# Altium PCB PCB.PcbDoc
Units mil, origin at the board's own origin, x right, y up, seen from the top; angles counter-clockwise.
Board outline 6000 x 4000 mil, 2 copper layers (Top Layer, Bottom Layer); 47 components, 29 nets, 204 pads, 42 vias.
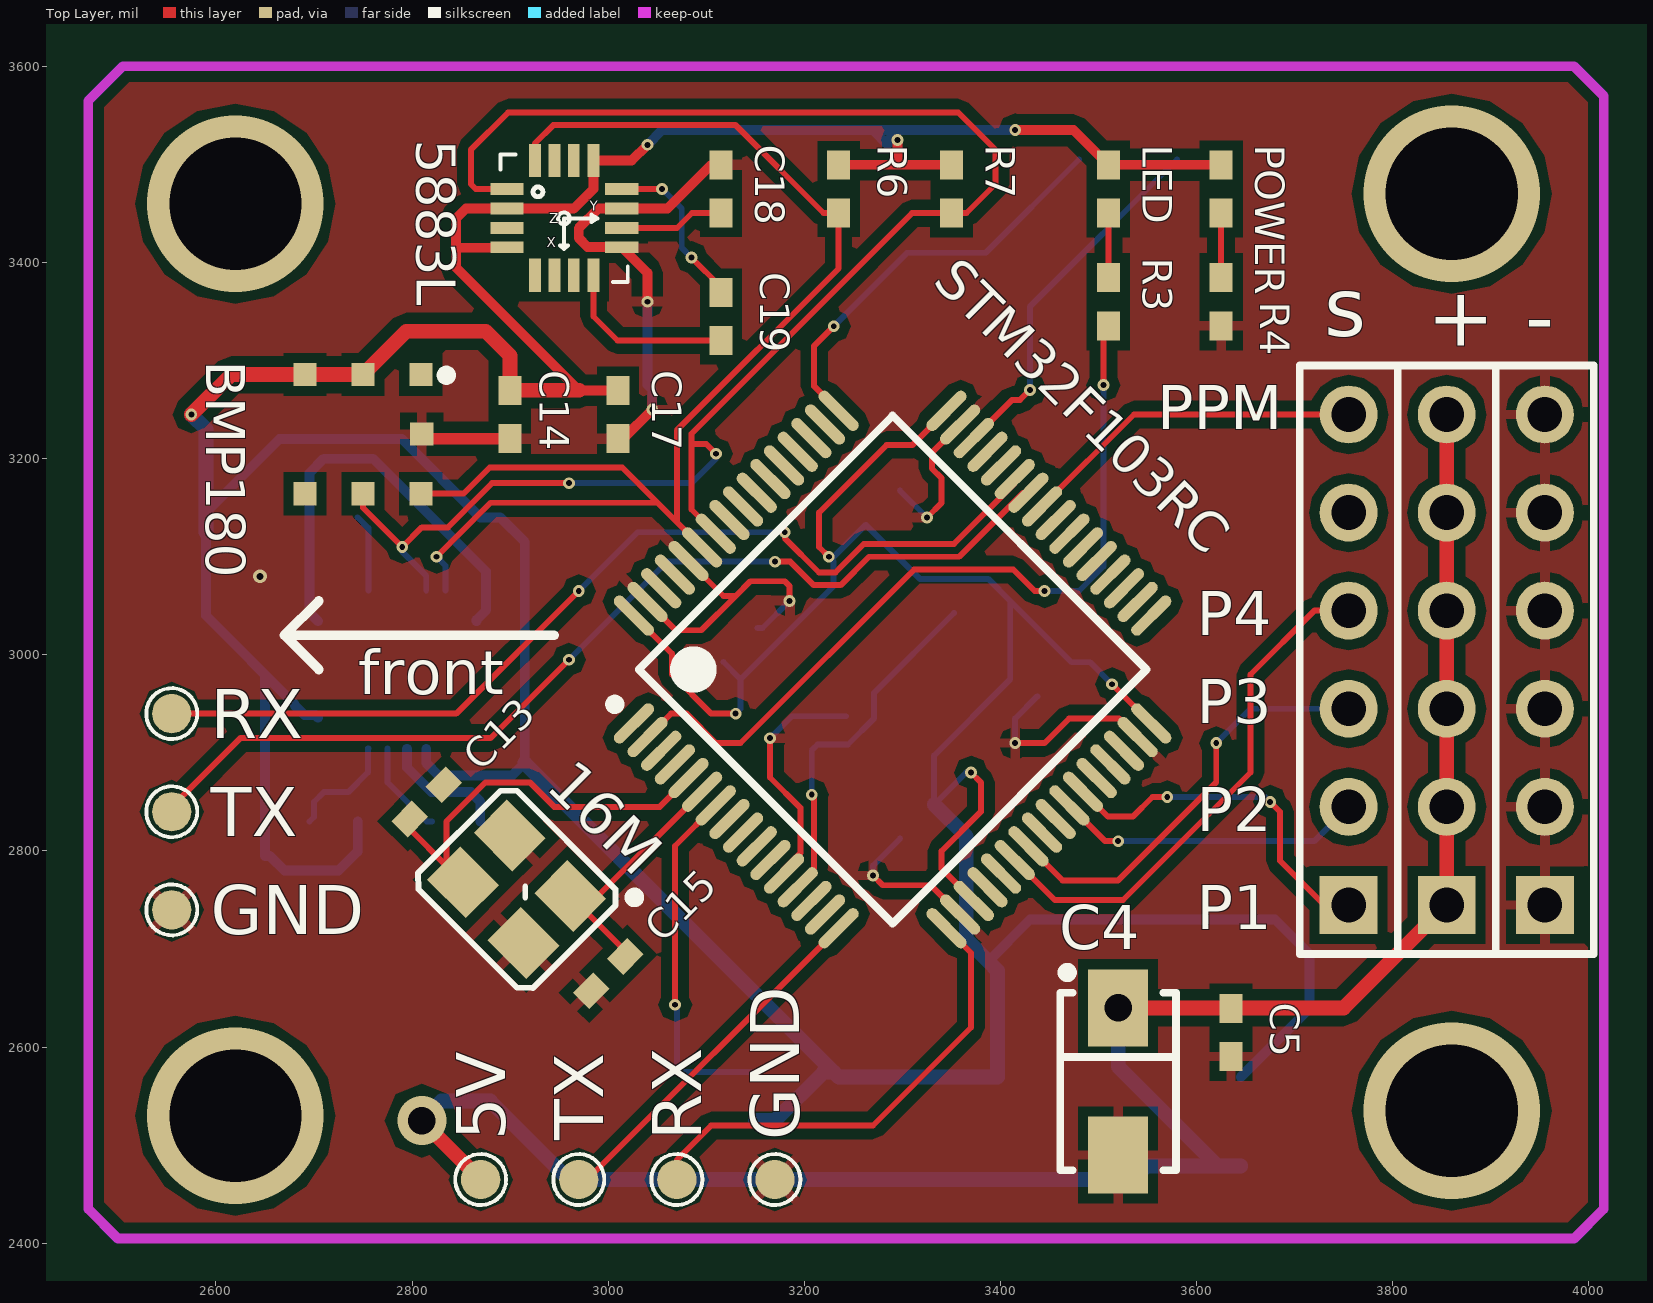
[diagram p0: Top Layer view]
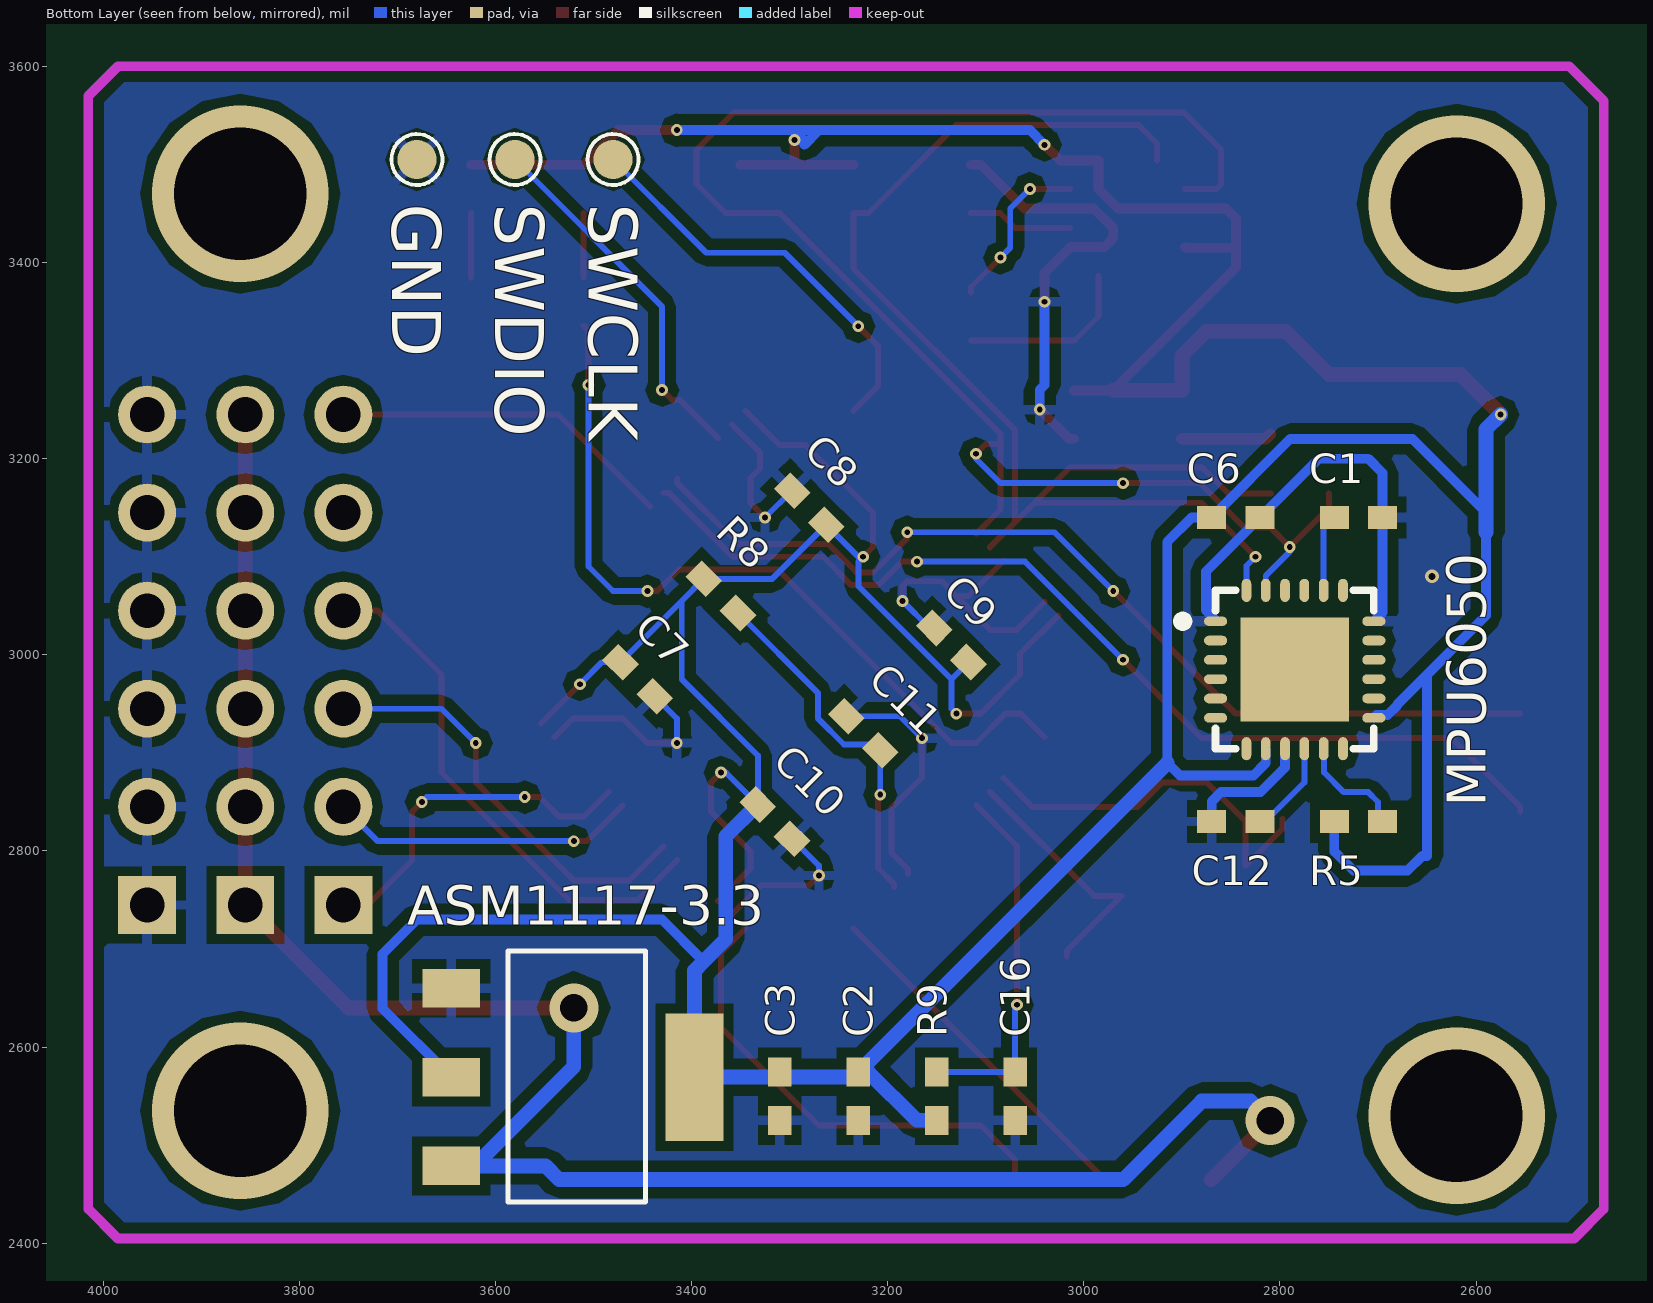
[diagram p1: Bottom Layer view, seen from below]

## Layer stack, top to bottom
Top Solder: solder mask 0.4, Solder Resist, Dk 3.5
Top Layer: signal copper 1.4
Dielectric 1: dielectric 12.6, FR-4, Dk 4.8
Bottom Layer: signal copper 1.4
Bottom Solder: solder mask 0.4, Solder Resist, Dk 3.5

## Board outline
1000,1000 7000,1000 7000,5000 1000,5000

## Design rules (kind name [scope] priority, off if disabled: settings)
Clearance [All] p1: gap=7
ComponentClearance [All] p1: gap=0 collisioncheckmode=3 verticalgap=10 showdistances=FALSE
Height [All] p1: minheight=0 maxheight=1500 prefheight=1500
PolygonConnect [All] p1: connectstyle=Relief reliefconductorwidth=10 reliefentries=4 polygonreliefangle="90 Angle" airgapwidth=10
RoutingVias [All] p1: holewidth=6 width=12 viastyle="Through Hole" minholewidth=6 minwidth=12 maxholewidth=28 maxwidth=50
SolderMaskExpansion [All] p1: expansion=4
Width [All] p1: maxlimit=15 minlimit=6 preferedwidth=6
27 further rules are at their usual default settings.

## Components (designator, comment, footprint, x,y, rotation, side; value= is the part's Value field where it differs from the comment)
5V "VCC_5V" pad 2870,2465 r0 top (schematic designator P4)
16M "16M" TCXO 2900,2860 r315 top (schematic designator T1)
5883L "HMC5883L" HMC5883L 2900,3505 r0 top (schematic designator U3)
+ "Header 6" HDR1X6 3855,2745 r90 top (schematic designator P2)
- "Header 6" HDR1X6 3955,2745 r90 top (schematic designator P3)
ASM1117-3.3 "ASM1117-3.3" AMS1117 3645,2660 r270 bottom (schematic designator A1)
BMP180 "bmp180" BMP180 2750,3225 r270 top (schematic designator U2)
C1 "2.2nF" 0402packg 2720,3140 r180 bottom
C2 "4.7uF" 0402packg 3230,2550 r90 bottom
C3 "0.1uF" 0402packg 3310,2550 r90 bottom
C4 "10uF" "DIOM SMA_4326X27N" 3520,2565 r90 top
C5 "0.1uF" 0402packg 3635,2615 r90 top
C6 "0.1uF" 0402packg 2845,3140 r180 bottom
C7 "0.1uF" 0402packg 3455,2975 r45 bottom
C8 "0.1uF" 0402packg 3280,3150 r225 bottom
C9 "0.1uF" 0402packg 3135,3010 r225 bottom
C10 "0.1uF" 0402packg 3315,2830 r45 bottom
C11 "0.1uF" 0402packg 3225,2920 r45 bottom
C12 "0.1uF" 0402packg 2845,2830 r180 bottom
C13 "10pF" 0402packg 2815,2850 r225 top
C14 "0.1uF" 0402packg 2900,3245 r270 top
C15 "10pF" 0402packg 3000,2675 r225 top
C16 "1uF" 0402packg 3070,2550 r90 bottom
C17 "0.1uF" 0402packg 3010,3245 r90 top
C18 "4.7uF" 0402packg 3115,3475 r270 top
C19 "0.22uF" 0402packg 3115,3345 r270 top
GND "GND" pad 3680,3505 r270 bottom (schematic designator P13)
GND "GND" pad 2555,2740 r0 top (schematic designator P10)
GND "GND" pad 3170,2465 r0 top (schematic designator P7)
LED "LED" 0402packg 3510,3475 r90 top (schematic designator R1)
MPU6050 "MPU6050" MPU6050 2785,2985 r180 bottom (schematic designator M1)
POWER "LED" 0402packg 3625,3475 r90 top (schematic designator R2)
R3 "510R" 0402packg 3510,3360 r90 top
R4 "510R" 0402packg 3625,3360 r90 top
R5 "1K" 0402packg 2720,2830 r180 bottom
R6 "4.7K" 0402packg 3235,3475 r90 top
R7 "4.7K" 0402packg 3350,3475 r90 top
R8 "0R" 0402packg 3370,3060 r225 bottom
R9 "10K" 0402packg 3150,2550 r270 bottom
RX "U1_RX" pad 2555,2940 r270 top (schematic designator P8)
RX "GPS_RX" pad 3070,2465 r0 top (schematic designator P6)
s "Header 6" HDR1X6 3755,2745 r90 top (schematic designator P1)
STM32F103RC "STM32F103RC" STM3264Pin 3290,2985 r45 top (schematic designator U1)
SWCLK "SWCLK" pad 3480,3505 r0 bottom (schematic designator P11)
SWDIO "SWDIO" pad 3580,3505 r270 bottom (schematic designator P12)
TX "U1_TX" pad 2555,2840 r270 top (schematic designator P9)
TX "GPS_TX" pad 2970,2465 r0 top (schematic designator P5)

## Footprints (in the part's own frame and the unit in brackets; to place one, negate y for a bottom-side part, rotate by r counter-clockwise, add the part's x,y. Pads: shape width x height; smd on the part's side, far side on the other; paste and mask are expansions set on the pad)
0402packg [mm]
  rect 0.75x0.6 smd: 1(-0.625,0) 2(0.625,0)
  body extent -0.5,-0.25 0.5,0.25, height 0.5
AMS1117 [mm]
  rect 1x1.5 smd: 1(0,0) 2(2.3,0) 3(4.6,0)
  rect 3.3x1.5 smd: 4(2.3,6.3)
  silkscreen extent -0.97,1.47 5.53,5.03
BMP180 [mm] "QFN, 12-Leads, Body 3.60x3.55mm, Pitch 1.50mm, Thermal Pad 3.50x2.20mm, IPC Medium Density"
  rect 0.6x0.6 smd: 1(-1.542,1.5) 2(-1.542,0) 3(-1.542,-1.5) 4(1.542,-1.5) 5(1.542,0) 6(1.542,1.5) 7(0,1.524)
  silkscreen extent -1.65,2.03 -1.4,2.28, body extent -1.78,-1.78 1.78,1.78, height 0.8
"DIOM SMA_4326X27N" [mm] "Molded Diode, 2-Leads, Body 4.3x2.6mm, IPC Medium Density"
  rect 2x1.55 smd: 1(-1.905,0) 2(1.905,0)
  silkscreen extent -2.3,-1.5 2.95,1.5, body extent -2.29,-1.46 2.28,1.46, height 2.67
HDR1X6 [mm] "Connector; Header; 6 Position"
  rect 1.5x1.5 hole 0.9: 1(0,0)
  round 1.5 hole 0.9: 2(2.54,0) 3(5.08,0) 4(7.62,0) 5(10.16,0) 6(12.7,0)
  silkscreen extent -1.27,-1.27 13.97,1.27
HMC5883L [mil]
  rect 34x12 smd: 1(-3.07,-30) 2(-3.07,-50) 3(-3.07,-69.84) 4(-3.07,-89.53) 9(114,-89.53) 10(114,-69.84) 11(114,-50) 12(114,-30)
  rect 12x34 smd: 5(25.47,-118.07) 6(45.16,-118.07) 7(65,-118.07) 8(85,-118.07) 13(85,-1) 14(65,-1) 15(45.16,-1) 16(25.47,-1)
  silkscreen extent -10,-125 120,5
MPU6050 [mm]
  oval 0.6x0.25 smd: 1(-2.05,1.25) 2(-2.05,0.75) 3(-2.05,0.25) 4(-2.05,-0.25) 5(-2.05,-0.75) 6(-2.05,-1.25) 13(2.05,-1.25) 14(2.05,-0.75) 15(2.05,-0.25) 16(2.05,0.25) 17(2.05,0.75) 18(2.05,1.25)
  oval 0.25x0.6 smd: 7(-1.25,-2.05) 8(-0.75,-2.05) 9(-0.25,-2.05) 10(0.25,-2.05) 11(0.75,-2.05) 12(1.25,-2.05) 19(1.25,2.05) 20(0.75,2.05) 21(0.25,2.05) 22(-0.25,2.05) 23(-0.75,2.05) 24(-1.25,2.05)
  rect 2.8x2.7 smd: 25(0,0)
  silkscreen extent -3.03,-2.05 2.05,2.05, body extent -2.05,-2.05 2.05,2.05, height 0.8
pad [mil]
  rrect100% 40x40 smd rot 135: 1(0,0)
  silkscreen extent -26,-26 26,26
STM3264Pin [mm] "TSQFP, 64-Leads, Body 12.0x12.0mm (max), Pitch 0.50mm, IPC Medium Density"
  oval 1.35x0.3 smd: 1(-5.725,3.75) 2(-5.725,3.25) 3(-5.725,2.75) 4(-5.725,2.25) 5(-5.725,1.75) 6(-5.725,1.25) 7(-5.725,0.75) 8(-5.725,0.25) 9(-5.725,-0.25) 10(-5.725,-0.75) 11(-5.725,-1.25) 12(-5.725,-1.75) 13(-5.725,-2.25) 14(-5.725,-2.75) 15(-5.725,-3.25) 16(-5.725,-3.75) 33(5.725,-3.75) 34(5.725,-3.25) 35(5.725,-2.75) 36(5.725,-2.25) 37(5.725,-1.75) 38(5.725,-1.25) 39(5.725,-0.75) 40(5.725,-0.25) 41(5.725,0.25) 42(5.725,0.75) 43(5.725,1.25) 44(5.725,1.75) 45(5.725,2.25) 46(5.725,2.75) 47(5.725,3.25) 48(5.725,3.75)
  oval 0.3x1.35 smd: 17(-3.75,-5.725) 18(-3.25,-5.725) 19(-2.75,-5.725) 20(-2.25,-5.725) 21(-1.75,-5.725) 22(-1.25,-5.725) 23(-0.75,-5.725) 24(-0.25,-5.725) 25(0.25,-5.725) 26(0.75,-5.725) 27(1.25,-5.725) 28(1.75,-5.725) 29(2.25,-5.725) 30(2.75,-5.725) 31(3.25,-5.725) 32(3.75,-5.725) 49(3.75,5.725) 50(3.25,5.725) 51(2.75,5.725) 52(2.25,5.725) 53(1.75,5.725) 54(1.25,5.725) 55(0.75,5.725) 56(0.25,5.725) 57(-0.25,5.725) 58(-0.75,5.725) 59(-1.25,5.725) 60(-1.75,5.725) 61(-2.25,5.725) 62(-2.75,5.725) 63(-3.25,5.725) 64(-3.75,5.725)
  silkscreen extent -5.85,-4.65 4.65,4.65, body extent -5,-5 5,5, height 1.6
TCXO [mil]
  rect 56x48 smd: 1(118.31,-31.54) 2(31,-31.54) 3(31,-99) 4(118.31,-99)
  silkscreen extent -8,-136 170,18

## Part data
5V GND GND GND RX RX SWCLK SWDIO TX TX: library part PAD
16M: library part TCXO
+ - s: "Header, 6-Pin"
C1 C2 C3 C5 C6 C7 C8 C9 C10 C11 C12 C13 C14 C15 C16 C17 C18 C19: library part C0402
C4: library part Dan_C
LED POWER R3 R4 R5 R6 R7 R8 R9: library part R0402

## Via types
v1: diameter 12, hole 6, Top Layer to Bottom Layer, 35 vias
v2: diameter 180, hole 135, Top Layer to Bottom Layer, 4 vias
v3: diameter 50, hole 28, Top Layer to Bottom Layer, 2 vias
v4: diameter 14, hole 7, Top Layer to Bottom Layer, 1 vias

## Nets (pads, with @x,y where several pads share a name; then routed paths per layer and width w, separated by ;. In a path a pad name is that pad's centre, name@x,y a point inside that pad or via, vN(x,y) a via of type N, cw(c..) or ccw(c..) an arc to the next point about the centre after c; other vN are vias at no path point)
GND: 16M.2 16M.4 5883L.9 5883L.11 -.1 -.2 -.3 -.4 -.5 -.6 ASM1117-3.3.1 BMP180.7 C1.2 C2.1 C3.1 C4.1 C5.1 C6.2 C7.1 C8.1 C9.1 C10.1 C11.2 C12.1 C14.2 C15.2 C16.1 C17.1 C18.1 GND.1 MPU6050.1 MPU6050.9 MPU6050.18 R4.1 STM32F103RC.12 STM32F103RC.18 STM32F103RC.31 STM32F103RC.47 STM32F103RC.60 STM32F103RC.63 | length 2175.8
  Top Layer w6: STM32F103RC.63 3069.05,3025 3095,3025 3130,3060 ; STM32F103RC.60 3117.56,3060 3130,3060 ; v1(3165,2915) 3165,2875 3195.94,2844.06 3195.94,2797.91 3179.34,2781.31 STM32F103RC.12 ; v1(3185,3055) 3185,3070 3180,3075 3145,3075 3130,3060 ; v1(3270,2775) 3280,2765 3329.05,2765 STM32F103RC.18 ; v1(3325,3140) 3340,3155 3340,3180 3330,3190 3330,3205.95 STM32F103RC.47 ; v1(3415,2910) 3445,2910 3470,2935 3520.95,2935 STM32F103RC.31
  Top Layer w10: C17.1 3015.39,3220.39 v1(3045,3250) ; v1(3040,3360) 3040,3389.47 5883L.9 3013.54,3415.93 2979.07,3415.93 2970,3425 2970,3435 2990,3455 5883L.11 3060.46,3455 3105.06,3499.61 C18.1
  Top Layer w12: BMP180.7 2814.61,3220.39 C14.2
  Bottom Layer w6: C9.1 3157.4,3027.4 v1(3185,3055) ; v1(3165,2915) 3187.4,2937.4 C11.2 ; v1(3270,2775) 3270,2785 C10.1 ; C8.1 3297.6,3167.4 v1(3325,3140) ; v1(3415,2910) 3415,2935 C7.1
  Bottom Layer w10: MPU6050.18 2695.39,3043.11 C1.2 2695.39,3185.39 2710,3200 2760.39,3200 C6.2 2875.39,3085 2875.39,3045.39 2865.71,3035.71 MPU6050.1 ; MPU6050.9 2794.84,2885.16 2820,2860 2860,2860 2869.61,2850.39 C12.1 ; v1(3040,3360) 3040,3275 3045,3270 v1(3045,3250)
  other v4: 2645,3080
GPS_RX: RX.1@3070,2465 STM32F103RC.17 | length 487.5
  Top Layer w6: RX.1@3070,2465 3070,2485 3105,2520 3270,2520 3370,2620 3370,2696.21 STM32F103RC.17
GPS_TX: STM32F103RC.16 TX.1@2970,2465 | length 371.2
  Top Layer w6: TX.1@2970,2465 2978.79,2465 STM32F103RC.16
I2C_SCL: 5883L.1 BMP180.5 MPU6050.23 R7.1 STM32F103RC.58 | length 1719.8
  Top Layer w6: BMP180.5 2750,3150 v1(2790,3110) 2810,3130 2836.62,3130 2881.62,3175 v1(2960,3175) ; 5883L.1 2865,3475 2860,3480 2860,3515 2898,3553 3357,3553 3395,3515 3395,3480 3365.39,3450.39 R7.1 3309.96,3450.39 3085,3225.43 3085,3215 ; STM32F103RC.58 3085,3148.24 3085,3215 ; v1(3110,3205) 3100,3215 3085,3215
  Bottom Layer w6: v1(2790,3110) 2790,3105 2814.53,3080.47 MPU6050.23 ; v1(2960,3175) 3085,3175 3110,3200 v1(3110,3205)
I2C_SDA: 5883L.16 BMP180.6 MPU6050.24 R6.1 STM32F103RC.59 | length 1373
  Top Layer w6: BMP180.6 2852.52,3164.29 2879.23,3191 3014.4,3191 3050.4,3155 ; v1(2825,3100) 2880,3155 3050.4,3155 ; 5883L.16 2925.47,3521.46 2944.02,3540 3130,3540 3219.61,3450.39 R6.1 3235,3393.82 3070,3228.82 3070,3135.4 ; STM32F103RC.59 3070,3135.4 ; 3050.4,3155 3070,3135.4
  Bottom Layer w6: v1(2825,3100) 2834.21,3090.79 MPU6050.24
LED0: R3.1 STM32F103RC.2 | length 827.4
  Top Layer w6: STM32F103RC.2 3064.05,2940 3080,2940 3110,2910 3135,2910 3312,3087 3413,3087 3435,3065 v1(3445,3065) ; v1(3505,3275) 3505,3330.39 R3.1
  Bottom Layer w6: v1(3445,3065) 3480,3065 3505,3090 v1(3505,3275)
NetC1_1: C1.1 MPU6050.20 | length 78.8
  Bottom Layer w6: C1.1 2755.47,3129.13 MPU6050.20
NetC11_1: C11.1 R8.2 STM32F103RC.13 | length 365.6
  Top Layer w6: STM32F103RC.13 3193.26,2766.07 3209.86,2782.67 3209.86,2855.14 v1(3207.6,2857.4)
  Bottom Layer w6: v1(3207.6,2857.4) C11.1 3213.61,2908.61 3244.45,2908.61 3271.19,2935.35 3271.19,2961.19 R8.2
NetC12_2: C12.2 MPU6050.10 | length 96.2
  Bottom Layer w6: MPU6050.10 2775.16,2869.84 2815,2830 C12.2
NetC13_2: 16M.3 C13.2 STM32F103RC.5 | length 394.1
  Top Layer w6: C13.2 2797.6,2822.39 2835,2784.99 2835,2830 2875,2870 2920,2870 2945,2845 3052.56,2845 STM32F103RC.5
NetC15_1: 16M.1 C15.1 STM32F103RC.6 | length 263.4
  Top Layer w6: C15.1 3017.4,2698 16M.1 2989.45,2754.05 STM32F103RC.6
NetC16_2: C16.2 R9.1 STM32F103RC.7 | length 373.3
  Top Layer w6: v1(3068.24,2643.24) 3068.24,2805 STM32F103RC.7
  Bottom Layer w6: v1(3068.24,2643.24) 3070,2645 C16.2 R9.1
NetC18_2: 5883L.10 C18.2 | length 107.3
  Top Layer w6: 5883L.10 3070.16,3435.16 3085.39,3450.39 C18.2
NetC19_1: 5883L.12 C19.1 | length 171.2
  Top Layer w6: 5883L.12 v1(3055,3475) ; v1(3085,3405) 3115,3375 C19.1
  Bottom Layer w6: v1(3055,3475) 3075,3455 3075,3415 v1(3085,3405)
NetC19_2: 5883L.8 C19.2 | length 182.1
  Top Layer w6: 5883L.8 2985,3345 3009.61,3320.39 C19.2
NetM1_11: MPU6050.11 R5.2 | length 114.7
  Bottom Layer w6: R5.2 2700,2834.61 2700,2850 2710,2860 2735,2860 2755,2880 2755,2904.69 2755.39,2904.29 MPU6050.11
NetR1_1: LED.1 R3.2 | length 65.8
  Top Layer w6: R3.2 LED.1
NetR2_1: POWER.1 R4.2 | length 65.8
  Top Layer w6: R4.2 POWER.1
PPM_IN: s.6 STM32F103RC.41 | length 351.4
  Top Layer w6: STM32F103RC.41 3536.08,3245 s.6
PWM1: s.1 STM32F103RC.27 | length 364.5
  Top Layer w6: STM32F103RC.27 3509.6,2835 3535,2835 3555,2855 v1(3570,2855) ; v1(3675,2850) 3685,2840 3685,2790 3730,2745 s.1
  Bottom Layer w6: v1(3570,2855) 3670,2855 v1(3675,2850)
PWM2: s.2 STM32F103RC.26 | length 314.4
  Top Layer w6: STM32F103RC.26 3506.76,2810 v1(3520,2810)
  Bottom Layer w6: v1(3520,2810) 3720,2810 s.2
PWM3: s.3 STM32F103RC.23 | length 436.8
  Top Layer w6: STM32F103RC.23 3463.24,2770 3520,2770 3620,2870 v1(3620,2910)
  Bottom Layer w6: v1(3620,2910) 3655,2945 s.3
PWM4: s.4 STM32F103RC.22 | length 538.1
  Top Layer w6: STM32F103RC.22 3455.4,2750 3525,2750 3655,2880 3655,2980 3720,3045 s.4
SWCLK: STM32F103RC.49 SWCLK.1 | length 425.3
  Top Layer w6: v1(3230,3335) 3210,3315 3210,3273.79 STM32F103RC.49
  Bottom Layer w6: v1(3230,3335) 3305,3410 3385,3410 SWCLK.1
SWDIO: STM32F103RC.46 SWDIO.1 | length 374.6
  Top Layer w6: STM32F103RC.46 3411.89,3260 3420,3260 v1(3430,3270)
  Bottom Layer w6: v1(3430,3270) 3430,3355 SWDIO.1
UART1_RX: RX.1@2555,2940 STM32F103RC.43 | length 998.5
  Top Layer w6: RX.1@2555,2940 2845,2940 v1(2970,3065) ; v1(3180,3125) 3180,3119 3215,3084 3231.63,3084 3260.63,3113 3352.51,3113 3414.58,3175.07 STM32F103RC.43
  Bottom Layer w6: v1(2970,3065) 3030,3125 v1(3180,3125)
UART1_TX: STM32F103RC.42 TX.1@2555,2840 | length 1031
  Top Layer w6: TX.1@2555,2840 2555,2845 2625,2915 2880,2915 v1(2960,2995) ; v1(3170,3095) 3185.62,3095 3209.62,3071 3237.01,3071 3266.01,3100 3357.9,3100 3423.15,3165.26 STM32F103RC.42
  Bottom Layer w6: v1(2960,2995) 3060,3095 v1(3170,3095)
VCC_3V3: 5883L.2 5883L.4 5883L.13 ASM1117-3.3.2 ASM1117-3.3.4 BMP180.2 BMP180.3 C2.2 C3.2 C6.1 C7.2 C8.2 C9.2 C10.2 C14.1 C17.2 LED.2 MPU6050.8 MPU6050.13 POWER.2 R5.1 R6.2 R7.2 R8.1 R9.2 STM32F103RC.19 STM32F103RC.32 STM32F103RC.48 STM32F103RC.64 | length 6288.9
  Top Layer w6: STM32F103RC.64 3065,3001.21 3065,2980 3105,2940 v1(3130,2940) ; v1(3225,3100) 3215,3110 3215,3145 3283.79,3213.79 3310,3213.79 STM32F103RC.48 ; v1(3370,2880) 3380,2870 3380,2840 3340,2800 3340,2781.89 STM32F103RC.19 ; v1(3513.79,2970) STM32F103RC.32
  Top Layer w10: 5883L.4 2896.46,3415 2845,3415 ; C17.2 2970.39,3269.61 2845,3395 2845,3415 ; v1(3040,3520) 3024,3504 5883L.13 2985,3475 2965,3455 5883L.2 2855,3455 2845,3445 2845,3415 ; R6.2 3295,3499.61 ; v1(3295,3525) 3295,3499.61 ; R7.2 3295,3499.61 ; v1(3415,3535) 3474.61,3535 LED.2 POWER.2
  Top Layer w15: v1(2575,3245) 2615.71,3285.71 BMP180.3 BMP180.2 2794.29,3330 2875,3330 2900,3305 C14.1 2970.39,3269.61
  Bottom Layer w6: C9.2 3135,2975.2 ; v1(3130,2940) 3135,2945 3135,2975.2 ; v1(3370,2880) 3365,2880 C10.2 3332.4,2897.4 3410,2975 3410,3054.8 ; v1(3513.79,2970) 3491.39,2992.4 C7.2 3410,3054.8 ; 3135,2975.2 3229.8,3070 3229.8,3095.2 v1(3225,3100) 3230,3100 C8.2 3317.8,3077.4 R8.1 3410,3054.8
  Bottom Layer w10: 2590,3125 2590,3040 2680.48,2949.52 2680.48,2948.46 2690.39,2938.55 2701.53,2938.55 MPU6050.13 ; 2590,3145 2665,3220 2789.61,3220 C6.1 2890,3140 2915,3115 2915,2890 ; 2650,2980 2650,2795 2655,2795 2670,2780 2725,2780 2744.61,2799.61 R5.1 ; MPU6050.8 2814.53,2889.51 2827.02,2877.02 2902.02,2877.02 2915,2890 ; 2915,2889.61 2915,2890 ; v1(3040,3520) 3055,3535 3270,3535 ; v1(3295,3525) 3285,3525 3285,3520 3270,3535 ; 3387.5,2687.5 3430,2730 3680,2730 3715,2695 3715,2639.45 ASM1117-3.3.2 ; v1(3415,3535) 3270,3535
  Bottom Layer w15: v1(2575,3245) 2590,3230 2590,3145 2590,3125 ; 2915,2889.61 C2.2 ; R9.2 3170.39,2525.39 3219.61,2574.61 C2.2 ; C10.2 3365,2814.8 3365,2710 3387.5,2687.5 3396.97,2678.03 ASM1117-3.3.4 3235.16,2569.45 C2.2
VCC_5V: 5V.1 +.1 +.2 +.3 +.4 +.5 +.6 ASM1117-3.3.3 C4.2 C5.2 | length 2048.5
  Top Layer w15: v3(2810,2525) 5V.1 ; v3(3520,2640) 3750,2640 +.1 +.2 +.3 +.4 +.5 +.6
  Bottom Layer w15: v3(2810,2525) 2830,2545 2880,2545 2960,2465 3535,2465 3548.9,2478.9 ASM1117-3.3.3@3621.1,2478.9 ; v3(3520,2640) 3520,2580 ASM1117-3.3.3@3621.1,2478.9 ; ASM1117-3.3.3 ASM1117-3.3.3@3621.1,2478.9
pads on no net: 5883L.3 5883L.5 5883L.6 5883L.7 5883L.14 5883L.15 BMP180.1 BMP180.4 C13.1 MPU6050.2 MPU6050.3 MPU6050.4 MPU6050.5 MPU6050.6 MPU6050.7 MPU6050.12 MPU6050.14 MPU6050.15 MPU6050.16 MPU6050.17 MPU6050.19 MPU6050.21 MPU6050.22 MPU6050.25 s.5 STM32F103RC.1 STM32F103RC.3 STM32F103RC.4 STM32F103RC.8 STM32F103RC.9 STM32F103RC.10 STM32F103RC.11 STM32F103RC.14 STM32F103RC.15 STM32F103RC.20 STM32F103RC.21 STM32F103RC.24 STM32F103RC.25 STM32F103RC.28 STM32F103RC.29 STM32F103RC.30 STM32F103RC.33 STM32F103RC.34 STM32F103RC.35 STM32F103RC.36 STM32F103RC.37 STM32F103RC.38 STM32F103RC.39 STM32F103RC.40 STM32F103RC.44 STM32F103RC.45 STM32F103RC.50 STM32F103RC.51 STM32F103RC.52 STM32F103RC.53 STM32F103RC.54 STM32F103RC.55 STM32F103RC.56 STM32F103RC.57 STM32F103RC.61 STM32F103RC.62
copper on no net:
  other v2: 2620,2530 3860,2535 2620,3460 3860,3470

## Polygon pours and split planes (outlines as drawn)
GND on Top Layer "Top Layer-No Net" (solid, pour order 17): 2470,3600 4015,3600 4015,2405 2470,2405
GND on Bottom Layer "Top Layer-No Net" (solid, pour order 19): 2470,3600 4015,3600 4015,2405 2475,2405 2470,2400

## Keep-outs
Keep-Out Layer:
  lines w10: 2470,2435 2500,2405 3985,2405 4015,2435 4015,3570 3985,3600 2505,3600 2470,3565 2470,2435

## Silkscreen, mask and mechanical layers (free items; w line width, h text height)
Top Overlay:
  lines w10: 2705,2985 2670,3020 ; 2705,3055 2670,3020 ; 2945,3020 2670,3020
  text "PPM" at 3560,3230 h45
  text "P4" at 3600,3020 h45
  text "front" at 2745,2960 h45
  text "P3" at 3600,2930 h45
  text "P2" at 3600,2820 h45
  text "P1" at 3600,2720 h45
Top Solder:
  text "apm-lite" at 2515,2650 h45
Bottom Solder:
  text "flymaple" at 2840,2670 h45

## Text inside footprints (layer, text, board x,y; h text height)
5883L: Top Overlay "X" at 2937.28,3415.47 h10.2; Top Overlay "Y" at 2981,3453 h10.2; Top Overlay "Z" at 2940,3440 h10.2